# Altium PCB TIDA-010967_PCB.PcbDoc (part 4 of 5)
Units mil, origin at the board's own origin, x right, y up, seen from the top; angles counter-clockwise.
Board outline 2322.7 x 960 mil, 2 copper layers (Top Layer, Bottom Layer), stack 44.731 mil thick; 178 components, 80 nets, 496 pads, 399 vias.
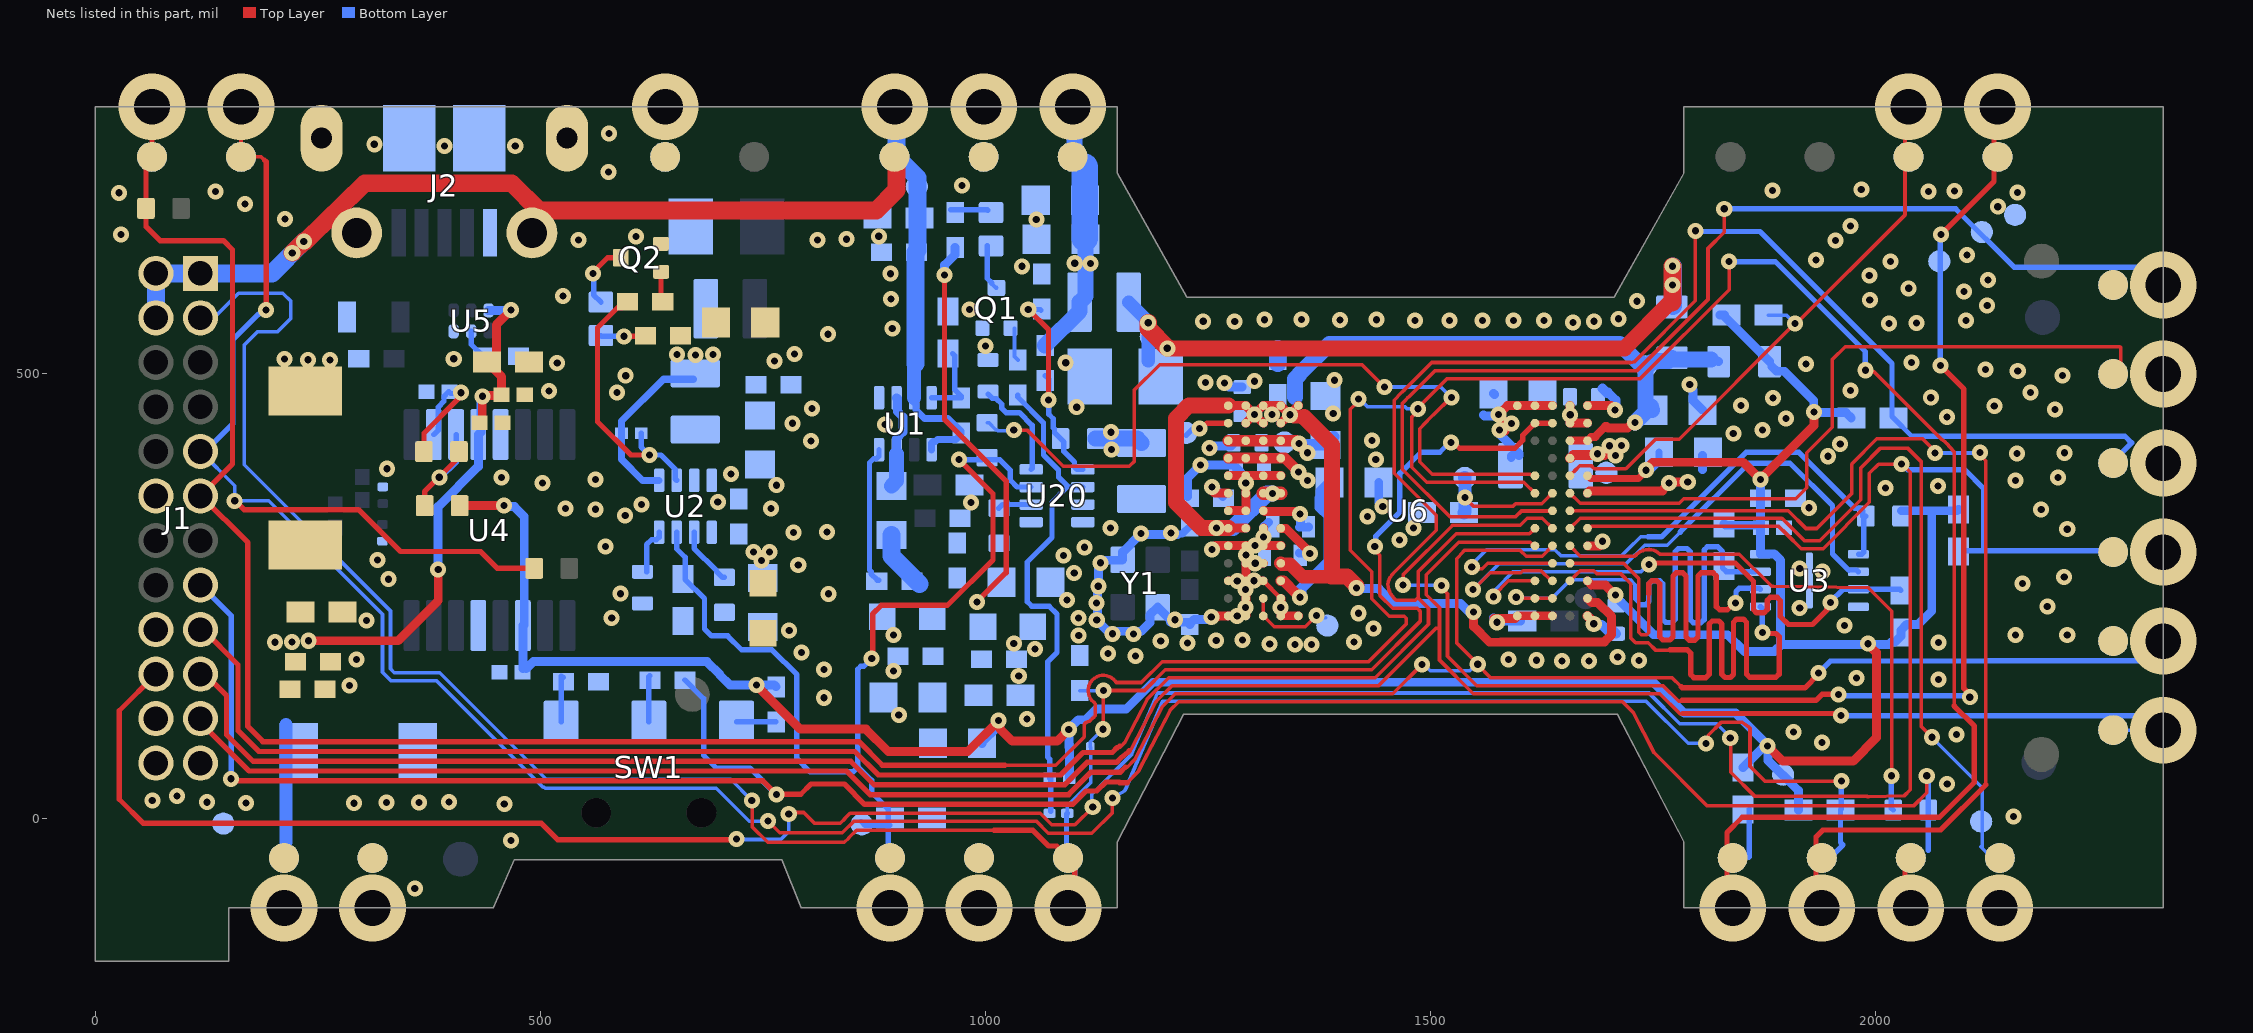
[diagram p2: the nets of this part, all layers, seen from the top]

## Via types
v1: diameter 18, hole 8, Top Layer to Bottom Layer, tented both sides, 370 vias
v2: diameter 75, hole 40, Top Layer to Bottom Layer, 26 vias
v3: diameter 118.11, hole 118.11, Top Layer to Bottom Layer, tented both sides, 3 vias

## Nets (pads, with @x,y where several pads share a name; then routed paths per layer and width w, separated by ;. In a path a pad name is that pad's centre, name@x,y a point inside that pad or via, vN(x,y) a via of type N, cw(c..) or ccw(c..) an arc to the next point about the centre after c; other vN are vias at no path point) (continued)
RS232_RX: (continued)
  Bottom Layer w4: J1.9@118.1,412.73 156.57,374.26 v1(156.57,357.38) 194.98,357.38 322.53,229.82 322.53,164.89 332.1,155.33 383.19,155.33 502.92,35.59 504.31,35.59 505.37,34.53 697.48,34.53 734.69,-2.68 754.87,-2.68 v1(755.38,-2.17) ; v1(1142.48,23.57) 1156.08,31.57 1157,32.48 1198.94,132.4 1741.54,132.4 1789.08,84.87 1808.74,84.87 v1@1808.93,84.67 ; v1(2066.35,411) 2115.69,411 v1@2116.29,410.41
  Bottom Layer w6: J1.9@118.1,412.73 123.25,412.73 154.28,443.76 154.28,538.01 183.25,566.98 183.76,566.98 188.61,571.83 v1(191.86,571.83) ; J7.1@1932.7,-43.75 1948.36,-43.75 1963.01,-29.1 1960.27,-26.36 R74.2@1960.27,10.2 1961.24,11.17 v1(1961.24,42.78)
  other v2: 1939.17,-100
RS232_TX: J1.11 J5.1 J31.1 R18.1 R73.2 U6.H4 | length 4463
  Top Layer w4: 1021.63,60.32 1078.91,60.32 1110.69,92.09 1110.69,104.79 1110.69,105.19 1110.77,105.58 cw(c1114.69,104.79) 1113.25,108.52 cw(c1277.2,-319.31) 1116.41,109.72 ccw(c1114.98,113.45) 1118.15,111.01 cw(c1131.7,100.75) 1121.82,114.58 1122.04,114.81 1123.21,115.98 1123.21,129.44 1122.04,130.61 1121.87,130.79 cw(c1132.21,144.28) 1145.7,154.62 1145.88,154.45 1147.05,153.28 1174.76,153.28 1198.23,176.74 1430.17,176.74 1472.31,218.88 1472.31,225.25 1469.97,227.59 1453.51,227.59 1433.89,247.22 1433.89,277.61 1409.56,301.93 1409.56,460.15 1419.01,469.6 v1(1419.01,471.52) ; v1@1485.19,460.16 1485.19,458.01 1478.65,451.47 1478.65,395.15 1495.5,378.3 1604.52,378.3 U6.H4@1617.02,365.81 ; v1(1485.69,460.69) 1485.69,461.71 1518.65,494.67 1735.41,494.67 1835.14,594.4 v1(1835.14,626) ; v1(1988.22,503.98) 1990.07,502.13 1997.95,502.13 2073.81,426.28 cw(c2066.35,411) 2079.21,422.13 2087.87,412.22 2087.89,410.54 2087.89,127.03
  Top Layer w6: v2(63.65,800) J31.1@63.65,743.75 56.91,737.01 R18.1@56.91,685.75 56.91,665.35 72.69,649.56 143.94,649.56 154.13,639.37 154.13,398.75 J1.11@118.1,362.73 118.83,362.73 171.26,310.29 171.26,103.76 188.25,86.78 857.57,86.78 884.03,60.32 1021.63,60.32 ; v2@1832.7,-100 1832.7,-15.33 1849.9,1.87 2071.35,1.87 2110.67,41.2 2110.67,104.25 2087.89,127.03
  Bottom Layer w4: v1(1419.01,471.52) 1420.52,471.52 1428.86,463.18 1470.93,463.18 1473.32,460.79 v1@1485.59,460.79 ; J5.1@1832.7,-43.75 1853.7,-43.75 J5.1@1855.63,-41.82
  Bottom Layer w6: v1(1835.14,626) 1886.96,626 1988.22,524.74 1988.22,504.77 v1@1988.62,504.37 ; 1857.03,-43.22 1857.62,-42.63 R73.2@1857.62,10.7
  other v2: 1839.17,-100
SOP0_H: R19.1 SW1.1 | length 44.6
  Bottom Layer w6: SW1.1@720.14,109.24 720.31,109.07 R19.1@764.63,109.07
SOP0_L: R21.2 SW1.3 | length 51.6
  Bottom Layer w6: SW1.3@523.29,109.24 R21.2@523.29,160.26 ; R21.2@525.39,159.3 R21.2@525.82,158.87
SPI_CLK_I2C_SCL: J1.20 J13.1 R75.2 U6.F1 | length 3524.9
  Top Layer w4: v1(778.9,5.57) 780.57,7.24 795.66,7.24 807.84,-4.95 836.73,-4.95 841.62,-0.05 ; 841.5,0.07 847.74,6.32 1061.45,6.32 1074.43,-6.67 1100.38,-6.67 v1(1120.35,13.31) ; U6.F1@1676.07,326.44 1677.65,326.44 1680.1,328.89 1890.61,328.89 1899.52,319.97 ; v1@1836.32,88.23 1836.95,87.6 1836.95,52.56 1864.22,25.29 1989.26,25.29 1990.27,25.2 ccw(c1991.75,42.14) 1991.49,25.14 1992.02,25.14 2031.64,25.81 2038.48,32.64 2038.48,389.28 v1(2028.96,398.8) 2028.64,398.48 2003.03,398.48 1992.69,388.14 1992.69,355.63 1940.69,303.63 1916.03,303.63 1899.61,320.05
  Top Layer w6: J1.20@68.1,162.73 26.88,121.5 26.88,22.07 53.93,-4.98 501.01,-4.98 519.31,-23.28 719.35,-23.28 v1(720.16,-22.47)
  Bottom Layer w4: v1(720.16,-22.47) 720.77,-23.08 769.9,-23.08 778.9,-14.08 v1(778.9,5.57) ; v1@1119.28,12.92 1119.28,27.63 1163.95,72.3 1193,141.48 1745.19,141.48 1779.81,106.87 1821.25,106.87 1836.32,91.8 v1@1836.32,88.23
  Bottom Layer w6: v1(2028.96,398.8) 2035.57,392.19 2099.98,392.19 2120.8,371.37 2120.8,301.31 ; R75.2@2099.05,302.5 2100.24,301.31 2120.8,301.31 ; J13.1@2266.57,299.73 2264.99,301.31 2120.8,301.31
  other v1: 1836.43,90.85
  other v2: 2322.82,299.73
SPI_CS_I2C_SDA: J1.17 J15.1 R4.2 U6.F4 | length 3197.9
  Top Layer w4: 1150.61,81.48 1150.61,80.58 1150.8,80.4 ; 1150.83,80.4 1151.72,81.06 1155.88,85.22 1181.81,134.87 1205.68,158.74 1437.63,158.74 1497.5,218.61 1497.5,236.76 1486.06,248.2 ; 1484.89,247.94 1482.55,245.59 1462.64,245.59 1461.02,245.59 1458.68,247.94 1455.32,252.43 cw(c1468.93,262.61) 1456.35,274.05 1459.61,277.64 1506.22,324.24 1506.22,341.17 1460.04,387.35 1458.87,388.52 1458.87,459.35 1459.03,460.47 1459.03,470.44 1466.88,478.64 cw(c1485.69,460.69) 1470.01,481.43 1501.25,512.67 1724.27,512.67 1728.92,513.63 1797.17,581.88 1797.17,660.44 v1(1797.38,660.65) ; 1486.06,248.42 1486.06,248.2 ; U6.F4@1617.08,326.61 1610.87,320.4 1572.65,320.4 1528.56,320.4 1486.06,277.9 1486.06,248.2
  Top Layer w6: J1.17@118.1,212.73 120.71,212.73 160.26,173.18 160.26,99.16 183.65,75.78 853.02,75.78 879.48,49.32 1084.23,49.32 1109.48,74.57 1142.29,74.57 1147.78,80.06 1150.59,81.46
  Bottom Layer w6: v1(1797.38,660.65) 1798.16,659.87 1869.69,659.87 2018.04,511.52 2018.04,452.07 R4.2@2019.6,450.51 2040.29,429.82 2279.83,429.82 2287.25,422.39 2266.57,401.71 J15.1@2266.57,399.73
  other v2: 2322.82,399.73
SPI_MISO_REG_MODE: J1.19 J17.1 U6.E4 | length 2706.7
  Top Layer w4: 1161.43,76.44 1161.66,76.21 1163.21,77.76 1191.39,131.72 1191.82,132.15 1209.41,149.74 1441.36,149.74 1505.85,214.23 1509.09,214.23 ; 1509.85,213.86 1509.85,178.52 1547.63,140.74 1757.23,140.74 1779.59,118.38 1782.81,118.38 ; 1509.85,214.23 1509.85,237.14 1495.06,251.93 1495.06,274.18 1531.49,310.6 1611.75,310.6 1615.43,306.92 U6.E4@1617.08,306.92
  Top Layer w6: J1.19@118.1,162.73 123.36,162.73 147.39,138.7 147.39,94.55 177.16,64.78 848.46,64.78 874.92,38.32 1088.79,38.32 1114.04,63.57 1146.85,63.57 1152.33,69.05 1159.8,74.6 1161.43,76.44 ; 1782.81,118.38 1958.53,118.38 v1(1960.83,116.09) ; v2@2291.16,98.82 v2@2304.6,98.82
  Bottom Layer w4: J17.1@2266.57,99.73 v2(2322.82,99.73)
  Bottom Layer w6: v1(1960.83,116.09) 2306.46,116.09 v2(2322.82,99.73)
SPI_MOSI: J1.21 J19.1 U6.E3 | length 2611.3
  Top Layer w4: 1156.88,58.05 1158.93,58.05 1167.23,66.35 1167.95,67.33 1198.8,126.4 1213.14,140.74 1457.45,140.74 v1(1490.25,173.59) ; v1@1551.46,172.77 1551.46,175.42 1529.33,197.55 1529.33,280.02 cw(c1546.08,282.92) 1529.33,285.82 1529.33,292.42 1536.46,300.35 1536.53,300.43 1537.7,301.6 1572.65,301.6 1600.64,301.6 1607.1,295.14 1614.52,295.14 1621.9,295.13 ; v1(1552.78,173.76) 1552.78,173.08 1567.12,158.74 1771.04,158.74 1781.39,148.39 ; 1621.9,295.12 1625.07,295.12 U6.E3@1636.7,306.75 ; U6.E3@1636.7,306.92 U6.E3@1636.77,306.92
  Top Layer w6: J1.21@118.1,112.73 118.1,108.28 172.61,53.78 843.9,53.78 870.37,27.32 1093.35,27.32 1118.6,52.57 1151.4,52.57 1156.88,58.05 ; 1781.39,148.39 1782.55,147.23 1920.31,147.23 v1@1935.64,162.56
  Bottom Layer w4: v1(1490.25,173.59) 1492.19,173.59 1499.35,166.42 1543.85,166.42 1551.86,174.43 v1@1552.42,174.43
  Bottom Layer w6: v1@1937.66,166.26 1948.88,177.49 2122.51,177.49 ; 2135.78,177.49 2122.51,177.49 ; v2(2322.82,199.73) 2300.64,177.54 2122.57,177.54 2122.51,177.49
  other v1: 1935.49,163.83
SW3_1V8: L15.1 U20.7
SW3_3V3: L2.1 U2.7
SW_PR1: R9.1 R10.2 U1.4 | length 87
  Bottom Layer w6: U1.4@939.35,473.02 969.94,473.02 R9.1@972.45,473.02 972.45,474.98 965.26,482.18 965.26,520.43 R10.2@962.82,522.88
SW_ST: R8.2 U1.8 | length 158.6
  Bottom Layer w6: U1.8@880.29,414.75 880.29,407.46 877.39,404.56 874.01,404.56 869.52,400.08 869.52,279.58 871.5,277.6 871.5,275.1 878.35,268.26 R8.2@880.32,268.26
TCK: J10.1 TP17.1 U6.F3 | length 1653.3
  Top Layer w4: v1@1467.88,262.67 1469.3,264.09 1469.3,274.6 1523.98,329.28 ; v1@1511.93,262.21 1511.93,259.78 1518.85,252.87 1518.85,182.6 1551.7,149.74 1760.95,149.74 1778.39,132.31 1781.7,132.31 1782.52,133.12 ; 1524.01,329.83 1600.36,329.83 1608.32,337.8 ; 1608.33,337.78 1625.36,337.78 ; 1625.31,337.9 1625.31,337.83 1625.36,337.78 ; U6.F3@1636.7,326.44 1625.36,337.78
  Top Layer w6: 1782.52,133.12 1932.76,133.12 1939.56,139.92 v1(1957.98,139.92) ; v1(2072.37,509.17) 2098.85,482.7 2098.85,146.62 2106.21,139.27 v1@2106.21,136.51 ; v1(2073.22,656.43) 2132.7,715.91 2132.7,743.75 v2@2132.7,800
  Bottom Layer w4: v1@1462.45,262.59 1463.74,263.89 1469.63,263.89 1470.92,262.59 v1@1505.74,262.59
  Bottom Layer w6: v1(1957.98,139.92) 1959.69,138.22 2104.5,138.22 v1@2106.21,136.51 ; v1(2072.37,509.17) 2072.37,654.45 v1@2074.35,656.43
  other v1: 2105.48,136.75 1512.29,262.21 1468.93,262.61
  other v2: 2136.65,800
TDI: J14.1 TP18.1 U6.F2 | length 962.3
  Top Layer w4: U6.F2@1656.39,326.44 1667.84,337.89 1894.5,337.89 1919.76,312.63 1936.96,312.63 1982.83,358.49 1982.83,394.18 2005.26,416.61 2035.48,416.61 2051.19,400.9 2051.19,103.36 2062.56,91.99 v1@2062.56,91.89
  Bottom Layer w4: v1(2063.14,91.75) 2063.14,91.3 2119.56,34.88 2119.56,-32.89 ; 2117.85,-31.19 2119.56,-32.89 ; J14.1@2132.7,-43.75 2130.42,-43.75 2119.56,-32.89
  other v2: 2139.17,-100
TDO_SOP0: J1.15 J12.1 R20.1 R22.1 | length 2631.1
  Top Layer w4: 1159,40.81 1171.48,53.3 1207.61,122.48 1216.87,131.74 1715.31,131.74 1726.71,120.34 1727.14,119.91 1751.01,74.17 1751.45,73.74 1810.57,14.62 2042.22,14.62 2057.13,29.52 v1(2057.13,48.48)
  Top Layer w6: v1(152.56,45.07) 154.85,42.78 749.72,42.78 v1(765.2,27.3) ; v1@764.49,27.73 792.35,27.73 803.83,39.21 841.28,39.21 864.17,16.32 1097.9,16.32 1112.89,31.31 1124.77,31.31 1135.03,41.57 1149.94,41.57 1150.69,40.81 1159,40.81 ; v2@2032.7,-100 J12.1@2032.7,-43.75
  Bottom Layer w6: J1.15@118.1,262.73 152.56,228.27 v1(152.56,45.07) ; R20.1@662.23,155.99 683.38,134.84 683.38,71.31 697.47,57.22 735.14,57.22 v1@764.69,27.67 ; v1@2058.88,43.77 2058.88,-5.31 2058.93,-35.38
  other v2: 2039.17,-100
TMS: J6.1 TP19.1 U6.G3 | length 1298.2
  Top Layer w4: 1475.89,474.58 1504.98,503.67 1731.69,503.67 1811.4,583.38 1811.4,640.79 1829.76,659.15 v1@1829.76,685.99 ; 1475.89,474.58 ccw(c1485.69,460.69) 1471.81,470.5 1468.03,466.72 1468.03,392.83 1521.54,339.32 1572.65,339.32 1595.29,339.32 1601.88,345.9 ; 1601.92,345.95 1601.88,345.9 ; U6.G3@1636.77,345.9 1601.88,345.9
  Bottom Layer w6: v1(1829.67,685.36) 2089.64,685.36 2155.26,619.74 2302.82,619.74 v2(2322.82,599.73)